# EAGLE board digital_lockin_LOOK_AT_THIS (EAGLE 9.6.2)
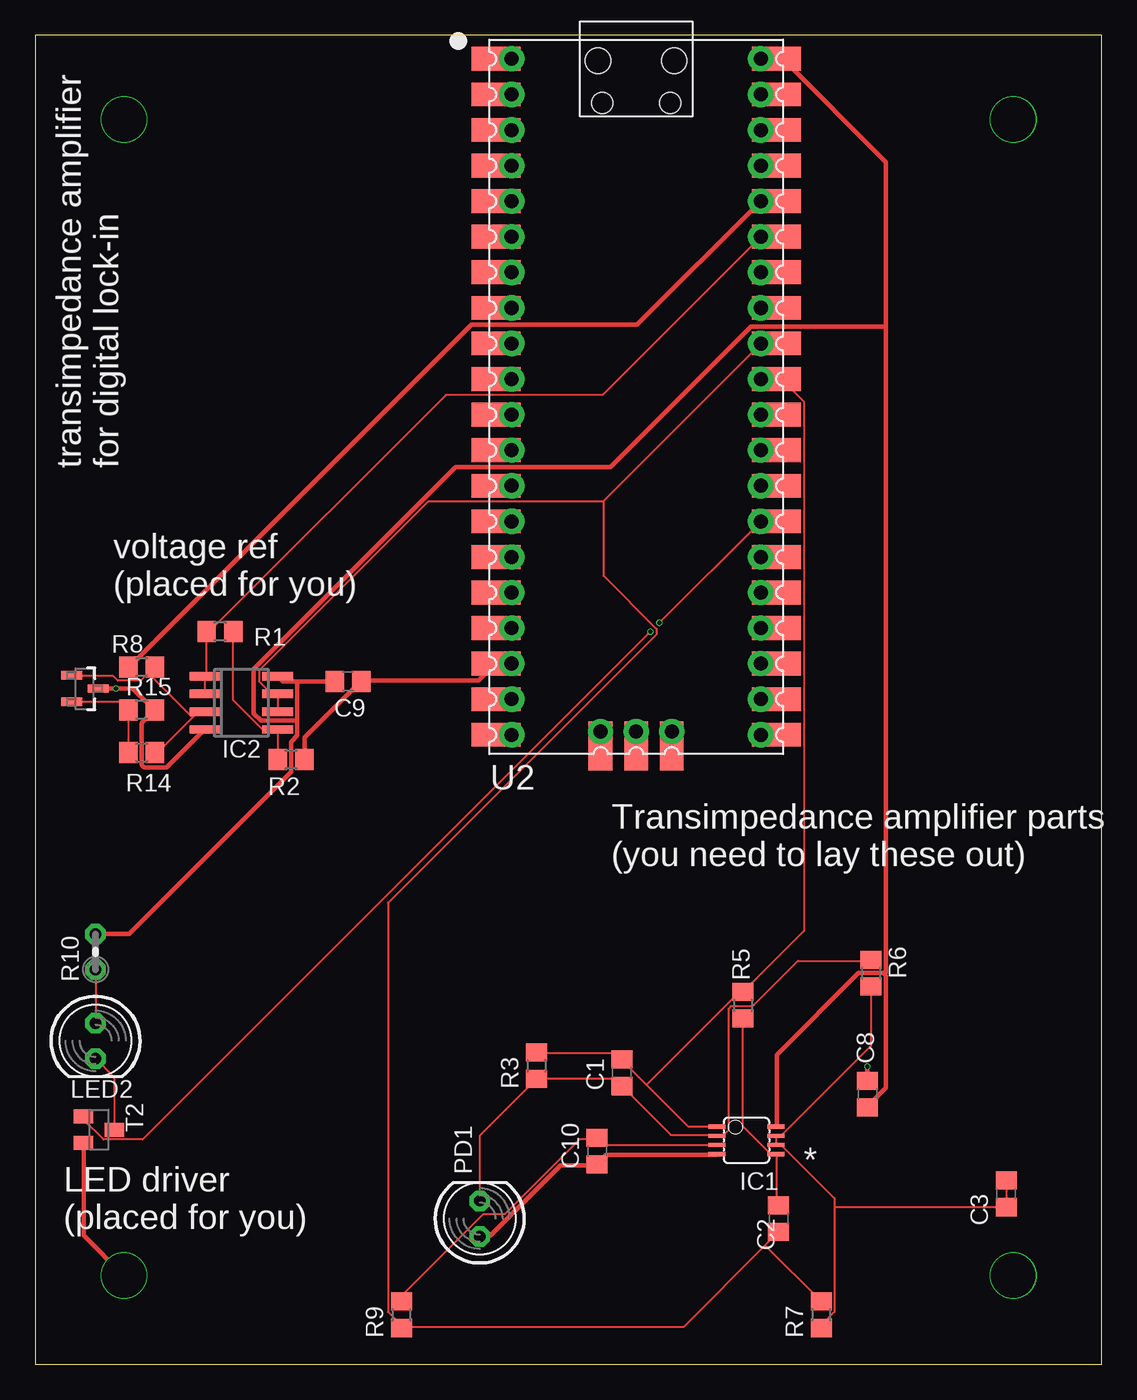
[diagram p0: board, top side]
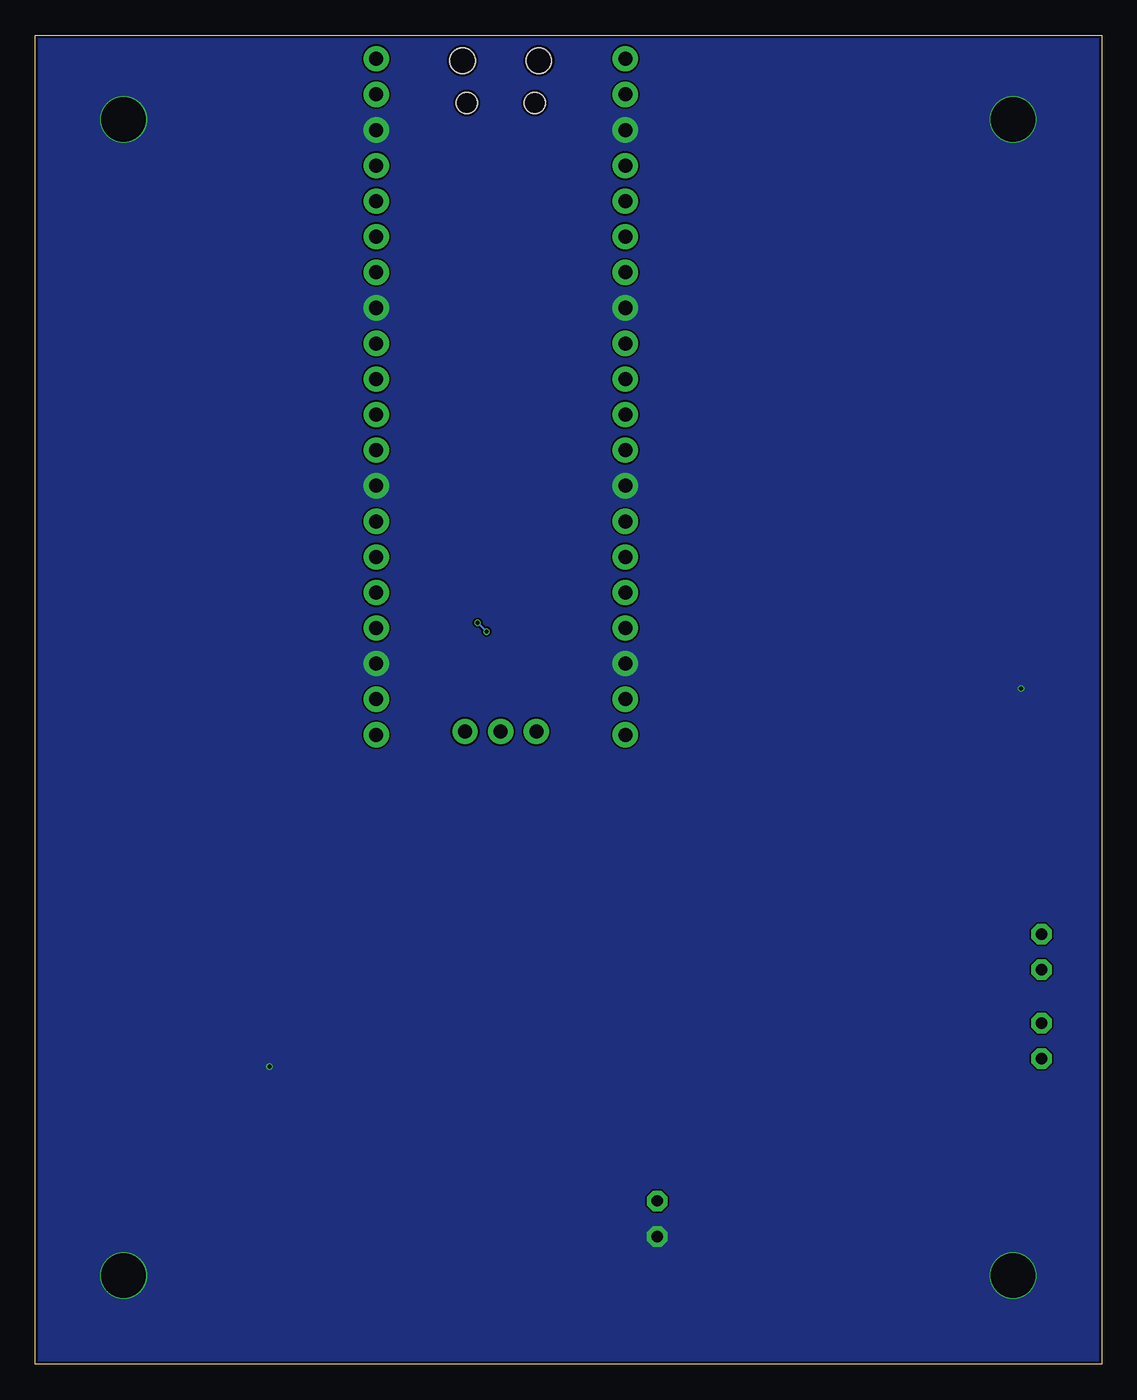
[diagram p1: board, bottom side, seen from below]

Size 76.18 x 94.92 mm. Coordinates in mm from the lower left corner, seen from the top.
Outline: 0,0 76.18,0 76.18,94.92 0,94.92 0,0
Copper layers (1*16): Top 0.035mm / dielectric 1.6mm / Bottom 0.035mm
Design rules "jlcpcb-2layers": minimum track width 5mil, minimum drill 0.3mm, track to track 5mil, track to pad 5mil, pad to pad 5mil, via to via 5mil, smd to smd 5mil, copper to edge 0.2mm, drill to drill 6mil, minimum pad ring 10mil, minimum via ring 3mil, stop-mask expansion 4mil, vias tented up to drill 0mil, thermal gap 10mil
Net classes: 1 power: width 0.305 mm

## Footprints (pad centres in the part's own frame; a part is rotated, then mirrored left to right if it is on the bottom)
C0805 = smd 1.3 x 1.5: 1 -0.95,0; 2 0.95,0
MSOP08 = smd 0.3 x 1.2: 1 -0.976,-2.113; 2 -0.326,-2.113; 3 0.324,-2.113; 4 0.974,-2.113; 5 0.974,2.112; 6 0.324,2.112; 7 -0.326,2.112; 8 -0.976,2.112
SO08 = smd 0.6 x 2.2: 1 -1.905,-2.6; 2 -0.635,-2.6; 3 0.635,-2.6; 4 1.905,-2.6; 5 1.905,2.6; 6 0.635,2.6; 7 -0.635,2.6; 8 -1.905,2.6
LED5MM = drill 0.813 octagon: A -1.27,0; K 1.27,0
R0805 = smd 1.3 x 1.5: 1 -0.95,0; 2 0.95,0
0204V = drill 0.813 octagon: 1 -1.27,0; 2 1.27,0
SOT23-BEC = smd 1 x 1.4: B -0.95,-1.1; C 0,1.1; E 0.95,-1.1
PICO-PKG = drill 1: 1 -8.89,24.13; 2 -8.89,21.59; 3 -8.89,19.05; 4 -8.89,16.51; 5 -8.89,13.97; 6 -8.89,11.43; 7 -8.89,8.89; 8 -8.89,6.35; 9 -8.89,3.81; 10 -8.89,1.27; 11 -8.89,-1.27; 12 -8.89,-3.81; 13 -8.89,-6.35; 14 -8.89,-8.89; 15 -8.89,-11.43; 16 -8.89,-13.97; 17 -8.89,-16.51; 18 -8.89,-19.05; 19 -8.89,-21.59; 20 -8.89,-24.13; 21 8.89,-24.13; 22 8.89,-21.59; 23 8.89,-19.05; 24 8.89,-16.51; 25 8.89,-13.97; 26 8.89,-11.43; 27 8.89,-8.89; 28 8.89,-6.35; 29 8.89,-3.81; 30 8.89,-1.27; 31 8.89,1.27; 32 8.89,3.81; 33 8.89,6.35; 34 8.89,8.89; 35 8.89,11.43; 36 8.89,13.97; 37 8.89,16.51; 38 8.89,19.05; 39 8.89,21.59; 40 8.89,24.13; 41 -2.54,-23.9; 42 0,-23.9; 43 2.54,-23.9 | smd 3.5 x 1.7: P$1 -10,24.13; P$2 -10,21.59; P$3 -10,19.05; P$4 -10,16.51; P$5 -10,13.97; P$6 -10,11.43; P$7 -10,8.89; P$8 -10,6.35; P$9 -10,3.81; P$10 -10,1.27; P$11 -10,-1.27; P$12 -10,-3.81; P$13 -10,-6.35; P$14 -10,-8.89; P$15 -10,-11.43; P$16 -10,-13.97; P$17 -10,-16.51; P$18 -10,-19.05; P$19 -10,-21.59; P$20 -10,-24.13; P$21 10,-24.13; P$22 10,-21.59; P$23 10,-19.05; P$24 10,-16.51; P$25 10,-13.97; P$26 10,-11.43; P$27 10,-8.89; P$28 10,-6.35; P$29 10,-3.81; P$30 10,-1.27; P$31 10,1.27; P$32 10,3.81; P$33 10,6.35; P$34 10,8.89; P$35 10,11.43; P$36 10,13.97; P$37 10,16.51; P$38 10,19.05; P$39 10,21.59; P$40 10,24.13 | smd 1.7 x 3.5: P$41 -2.54,-24.925; P$42 0,-24.925; P$43 2.54,-24.925 | hole 1.8: -2.725,24; 2.725,24 | hole 1.5: -2.425,20.97; 2.425,20.97
DBZ0003A_N = smd 1.5 x 0.6: 1 0.95,-0.95; 2 0.95,0.95; 3 -0.95,0

## Placement (x,y rotation side)
C1  5 pF  [C0805]  41.91,20.83 90 top
C2  0.1 uF  [C0805]  53.09,10.41 270 top
C3  0.1 uF  [C0805]  69.34,12.19 270 top
C8  0.1 uF  [C0805]  59.44,19.3 90 top
C9  0.1 uF  [C0805]  22.35,48.77 180 top
C10  0.1 uF  [C0805]  40.13,15.24 90 top
IC1  OPA2650E  [MSOP08]  50.8,16 270 top
IC2  LM358D  [SO08]  14.73,47.24 270 top
LED2  DNP  [LED5MM]  4.32,23.11 270 top
PD1  DNP  [LED5MM]  31.75,10.41 90 top
R1  1k  [R0805]  13.21,52.32 180 top
R2  1k  [R0805]  18.29,43.18 180 top
R3  1M  [R0805]  35.81,21.34 270 top
R5  1M  [R0805]  50.55,25.65 270 top
R6  100k  [R0805]  59.69,27.94 270 top
R7  1M  [R0805]  56.13,3.56 270 top
R8  1 k  [R0805]  7.62,49.78 180 top
R9  100k  [R0805]  26.16,3.56 270 top
R10  DNP  [0204V]  4.32,29.46 90 top
R14  1 k  [R0805]  7.62,43.69 0 top
R15  5k  [R0805]  7.62,46.74 180 top
T2  NPN  [SOT23-BEC]  4.57,16.76 270 top
U2  RASPBERRY_PICOSMD-TH  [PICO-PKG]  42.93,69.09 0 top
U5  TL431AIDBZR  [DBZ0003A_N]  3.56,48.26 180 top

## Library data of the parts
C1 = rcl; SPICEPREFIX: C
C2 C3 C8-C10 = rcl; LCSC_PART#: C28233; SPICEPREFIX: C
IC1 = burr-brown; ACTUAL_PART: OPA2381; LCSC_PART#: C181662; OC_FARNELL: unknown; OC_NEWARK: unknown
IC2 = linear; LCSC_PART#: C7950
LED2 PD1 = led
R1 R2 R8 R14 = rcl; LCSC_PART#: C17513; SPICEPREFIX: R
R3 R5 R7 = rcl; LCSC_PART#: C17514; SPICEPREFIX: R
R6 R9 = rcl; LCSC_PART#: C149504; SPICEPREFIX: R
R10 R15 = rcl; SPICEPREFIX: R
T2 = transistor; LCSC_PART#: C2145
U2 = RpiPico
U5 = tl431; COPYRIGHT: Copyright (C) 2025 Ultra Librarian. All rights reserved.; LCSC_PART#: C3113; MANUFACTURER_PART_NUMBER: TL431AIDBZR; MFR_NAME: Texas Instruments; REFDES: RefDes; TYPE: TYPE

## Nets
3V3 [power]: R8.2 U2.36 U2.P$36
5V [power]: C8.1 C9.2 IC1.8 IC2.8 R10.2 U2.40 U2.P$40
ADCMID: C2.2 IC2.6 IC2.7 R7.1 R9.2 U2.32 U2.P$32
ADCREF: IC2.1 IC2.2 R1.2 U2.35 U2.P$35
AMPOUT: C1.2 IC1.1 R3.1 R5.1 U2.31 U2.P$31
GND [power]: C8.2 C9.1 C10.1 IC1.4 IC2.4 PD1.A R2.1 R15.1 T2.E U2.3 U2.8 U2.13 U2.18 U2.23 U2.28 U2.33 U2.38 U2.P$3 U2.P$8 U2.P$13 U2.P$18 U2.P$23 U2.P$28 U2.P$33 U2.P$38 U5.3
LEDCTRL: T2.B U2.27 U2.P$27
N$1: C3.1 C3.2 IC1.6 IC1.7 R6.2 R7.2
N$2: C2.1 IC1.5 R5.2
N$3: LED2.K T2.C
N$5: C1.1 IC1.2 PD1.K R3.2 R6.1
N$7: C10.2 IC1.3 R9.1
N$9: IC2.3 R8.1 R14.2 U5.1
N$10: IC2.5 R1.1 R2.2
N$12: LED2.A R10.1
N$20: R14.1 R15.2 U5.2
SWGND: U2.42 U2.P$42
VSYS: U2.39 U2.P$39

## Tracks (layer width: path | path; a pad name or v marks a point on that pad's centre or on a via)
3V3
  Top 0.305: R8.2 6.73,49.78 31.18,74.23 42.99,74.23 U2.36 U2.P$36
5V
  Top 0.305: 18.73,48.77 17.72,48.77 IC2.8 | 18.73,48.77 C9.2 | R10.2 6.73,30.73 18.29,42.29 18.29,44.45 18.73,44.9 18.73,45.97 | 18.73,48.77 18.73,45.97 | 60.67,27.84 60.77,27.75 60.77,19.75 59.44,18.41 C8.1 | 60.67,27.84 60.58,27.94 58.8,27.94 52.96,22.1 52.96,17.02 IC1.8 | U2.P$40 53.4,93.22 60.77,85.85 60.77,74.11 | 60.77,74.11 60.77,27.94 60.67,27.84 | 18.73,45.97 16.13,45.97 15.62,46.48 15.62,49.66 30.04,64.07 41.08,64.07 51.12,74.11 60.77,74.11
ADCMID
  Top 0.127: 26.16,2.67 46.29,2.67 52.13,8.51 | 52.13,8.51 C2.2 | 52.13,8.51 R7.1 | IC2.6 IC2.7 16.89,47.88 16,48.77 16,49.53 28.07,61.59 40.51,61.59 40.55,61.63 | U2.32 40.55,61.63 | 26.16,2.67 26.16,2.79 25.21,3.75 25.21,32.96 44.39,52.13 44.39,52.51 40.58,56.33 40.58,61.59 40.55,61.63 | 26.16,2.67 R9.2
ADCREF
  Top 0.127: IC2.2 IC2.1 12.19,49.15 12.26,49.21 R1.2 12.45,52.32 29.34,69.22 40.51,69.22 U2.35
AMPOUT
  Top 0.127: 43.66,19.97 41.91,21.72 C1.2 41.47,22.23 35.81,22.23 R3.1 | 43.66,19.97 46.61,17.02 48.64,17.02 IC1.1 | 43.66,19.97 50.23,26.54 50.55,26.54 R5.1 54.93,30.99 54.93,68.71 53.28,70.36 U2.P$31
GND  (via drill 0.3, 3.17)
  Top 0.305: U5.3 v5.78,48.26 6.99,48.26 8.51,46.74 R15.1 8.45,46.61 7.62,45.78 7.62,42.8 7.81,42.61 9.4,42.61 IC2.4 | R2.1 19.24,44.77 23.24,48.77 C9.1 23.43,48.83 31.69,48.83 32.83,49.97 U2.P$18 U2.18 | IC1.4 48.64,14.99 40.77,14.99 40.13,14.35 C10.1 40.01,14.22 37.53,14.22 32.45,9.14 PD1.A | v6.35,6.35 3.49,9.21 3.49,15.81 T2.E | v59.44,21.27 C8.2 | U2.13 U2.P$13 | U2.23 U2.P$23 | U2.8 U2.P$8 | U2.28 U2.P$28 | U2.3 U2.P$3 | U2.33 U2.P$33 | U2.38 U2.P$38
  other vias: 69.85,6.35 6.35,88.9 69.85,88.9
  pour Bottom (no thermals): 0,95 0,0 76.2,0 76.2,95
  pour Bottom (no thermals): 0,95 76.2,95 76.2,0 0,0
LEDCTRL  (via drill 0.3)
  Top 0.127: v43.94,52.32 7.68,16.07 4.89,16.07 3.49,17.46 3.49,17.65 T2.B | U2.27 v44.58,52.96
  Bottom 0.127: v44.58,52.96 v43.94,52.32
N$1
  Top 0.127: C3.1 C3.2 57.09,11.24 | R6.2 59.69,22.73 53.34,16.38 52.96,16.38 IC1.7 52.9,16.32 52.9,15.68 IC1.6 52.96,15.62 53.34,15.62 57.09,11.87 57.09,11.24 | R7.2 56.13,2.79 57.09,3.75 57.09,11.24
N$2
  Top 0.127: C2.1 52.96,11.49 52.96,14.99 IC1.5 52.9,15.05 52.51,15.05 50.55,17.02 R5.2
N$3
  Top 0.127: LED2.K 5.65,20.51 5.65,16.76 T2.C
N$5
  Top 0.127: R3.2 41.47,20.38 41.91,19.94 C1.1 45.4,16.38 48.64,16.38 IC1.2 48.7,16.38 49.15,16.38 49.53,16.76 49.53,25.4 49.72,25.59 51.24,25.59 54.48,28.83 59.69,28.83 R6.1 | PD1.K 31.75,16.32 R3.2 | R3.2
N$7
  Top 0.127: IC1.3 48.64,15.68 40.58,15.68 40.13,16.13 C10.2 40.13,16.07 38.86,16.07 33.53,10.73 32,10.73 26.16,4.89 R9.1
N$9
  Top 0.127: U5.1 2.67,49.15 5.59,49.15 5.91,48.83 7.56,48.83 8.51,49.78 R8.1 8.13,49.34 11.27,46.2 | R14.2 8.76,43.69 11.27,46.2 | 11.27,46.2 11.68,46.61 IC2.3
N$10
  Top 0.127: R2.2 IC2.5 16.26,45.34 14.16,47.43 R1.1
N$12
  Top 0.127: R10.1 LED2.A
N$20
  Top 0.127: R15.2 R14.1 | R15.2 6.1,47.31 2.67,47.31 U5.2 | R15.2

## Text on the board
tPlace: TIPS: / turn off the ground airwires / command: ratsnest ! GND / "untangle" the remaining airwires as best you can / (see voltage ref for an example) / pour a ground plane on both sides / (use polygon on top layer(1) and then polygon on bottom layer (16) , type GND for the net name) / then use ripup/visible polygons so you can see what you're doing again / Tools->Autorouter will attempt to route the board automatically / If you do by hand, make one layer horizontal (e.g. top) wires / and one layer (e.g. bottom) vertical wires. / Use the middle mouse button to switch layers while drawing and insert a via automatically / At power supply GND and bypass capacitor grounds, try to make a short stub and then add a via (middle mouse button) / then hit esc to end on the via / this will make a connection to the ground plane on both sides of the board / After you autoroute, type ratsnest to fill the polygons and run a DRC to check for airwires. / Usually these are on the ground plane. / Add vias to ground (see above) where needed and on power supply pins/bypass caps | voltage ref / (placed for you) | Transimpedance amplifier parts / (you need to lay these out) | LED driver / (placed for you) | I have already done this, but to make the autorouter draw thick power wires (so they can carry current), use edit->net classes / to set the power nets and then rules to say a minimum width (here 12)
tNames: transimpedance amplifier / for digital lock-in | *